# Altium PCB PCB_TempLM50.pcbdoc
Units mm, origin at the board's own origin, x right, y up, seen from the top; angles counter-clockwise.
Board outline 44.45 x 36.45 mm, 2 copper layers (Top Layer, Bottom Layer); 3 components, 3 nets, 11 pads, 1 vias.
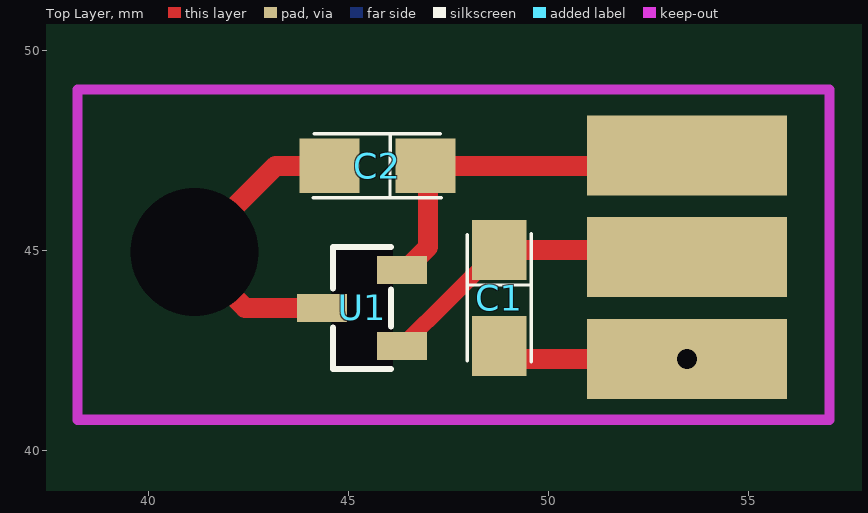
[diagram p0: Top Layer view]
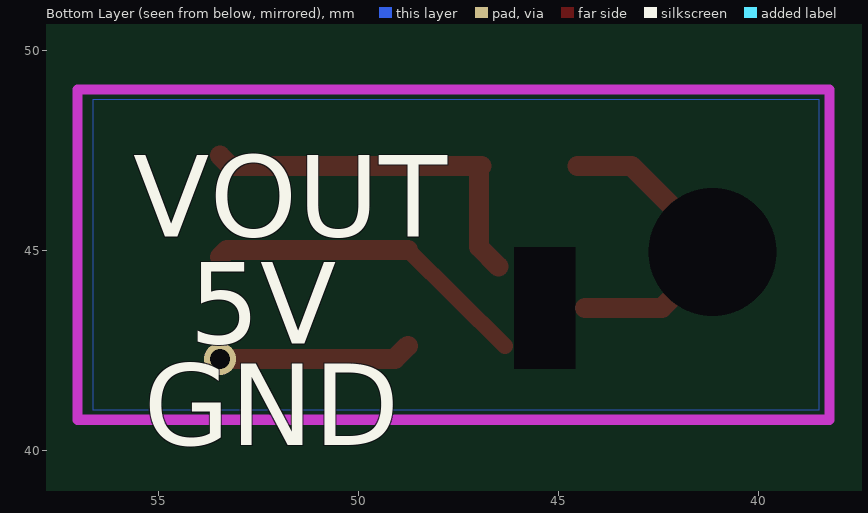
[diagram p1: Bottom Layer view, seen from below]

## Layer stack, top to bottom
Top Layer: signal copper (thickness not stored)
Dielectric: dielectric 0.32, FR-4, Dk 4.8
Bottom Layer: signal copper (thickness not stored)

## Board outline
69.85,25.4 25.4,25.4 25.4,61.849 69.85,61.849
cut-out: 44.577,45.085 44.577,42.037 46.101,42.037 46.101,45.085

## Components (designator, comment, footprint, x,y, rotation, side; value= is the part's Value field where it differs from the comment)
C1 "4.7uF" CASE-A_3216 48.768,43.815 r270 top
C2 "4.7uF" CASE-A_3216 45.72,47.117 r180 top
U1 "LM50CIM3X/NOPB" SOT-23-3_L2.9-W1.3-P1.90-LS2.4-BR 45.339,43.561 r0 top

## Footprints (in the part's own frame and the unit in brackets; to place one, negate y for a bottom-side part, rotate by r counter-clockwise, add the part's x,y. Pads: shape width x height; smd on the part's side, far side on the other; paste and mask are expansions set on the pad)
CASE-A_3216 [mm]
  rect 1.5x1.359 smd paste+0 mask+0.051: 1(-1.2,0) 2(1.2,0)
  silkscreen extent -1.6,-0.8 1.6,0.8
SOT-23-3_L2.9-W1.3-P1.90-LS2.4-BR [mm]
  rect 1.25x0.7 smd paste+0 mask+0.051: 1(1,-0.95) 2(1,0.95) 3(-1,0)
  silkscreen extent -0.73,-1.53 0.73,1.53

## Free pads (board coordinates)
  round 1.524 hole 3.2 paste+0 mask+1.8: 2(41.148,44.958)
  rect 5x2 smd paste+0: 3(53.467,42.291) 3(53.467,44.831) 3(53.467,47.371)

## Via types
v1: diameter 0.8, hole 0.5, Top Layer to Bottom Layer, tented both sides, 1 vias

## Nets (pads, with @x,y where several pads share a name; then routed paths per layer and width w, separated by ;. In a path a pad name is that pad's centre, name@x,y a point inside that pad or via, vN(x,y) a via of type N, cw(c..) or ccw(c..) an arc to the next point about the centre after c; other vN are vias at no path point)
5V: C1.1 pad.3@53.467,44.831 U1.1 | length 8.2
  Top Layer w0.4: U1.1 C1.1
  Top Layer w0.5: C1.1 53.283,45.015 pad.3@53.467,44.831
GND: C1.2 C2.2 pad.2 pad.3@53.467,42.291 U1.3 | length 13.1
  Top Layer w0.5: U1.3 42.418,43.561 41.021,44.958 43.18,47.117 C2.2 ; C1.2 49.092,42.291 v1(53.467,42.291)
VOUT: C2.1 pad.3@53.467,47.371 U1.2 | length 9.4
  Top Layer w0.5: U1.2@46.505,44.6 46.99,45.085 46.99,47.047 C2.1 53.213,47.117 pad.3@53.467,47.371

## Polygon pours and split planes (outlines as drawn)
GND on Bottom Layer (solid): 38.481,48.768 56.642,48.768 56.642,44.958 56.642,41.021 38.481,41.021 38.481,48.768

## Silkscreen, mask and mechanical layers (free items; w line width, h text height)
Bottom Overlay:
  text "VOUT" at 55.626,45.339 h2.03
  text "5V" at 54.229,42.672 h2.03
  text "GND" at 55.372,40.132 h2.03